# EAGLE board bodybase (EAGLE 9.2.2)

Size 135 x 235.4 mm. Coordinates in mm from the lower left corner, seen from the top.
Outline: 88.5,32.07 88.5,31.07 arc-90 87.5,30.07 47.5,30.07 arc-90 46.5,31.07 46.5,32.07 arc-90 47.5,33.07 87.5,33.07 arc-90 88.5,32.07
Outline: 61.15,190.3 61.15,213.3 73.85,213.3 73.85,190.3 61.15,190.3
Outline: 20.5,10.07 20.5,11.07 arc-90 21.5,12.07 45.5,12.07 arc-90 46.5,11.07 46.5,10.07 arc-90 45.5,9.07 21.5,9.07 arc-90 20.5,10.07
Outline: 104.5,177.88 104.5,177.55 arc46 105.08,176.19 105.95,175.35 107.71,174.03 131.79,156.07 132.61,155.46 arc-27 134.09,153.69 134.47,152.93 arc-27 135,150.69 135,77.83 arc-21 134.66,76.01 134.12,74.64 arc-21 133.14,73.07 132.29,72.14 119.83,58.62 118.97,57.7 arc21 117.99,56.13 117.46,54.76 arc21 117.12,52.94 117.12,5 arc-90 112.12,0 20.28,0 arc-90 17.28,3 17.28,51.68 17.28,52.96 arc21 16.95,54.74 16.41,56.17 arc21 15.47,57.71 14.62,58.67 2.66,72.1 1.81,73.05 arc-21 0.87,74.6 0.33,76.02 arc-21 0,77.8 0,150.69 arc-27 0.53,152.93 0.91,153.69 arc-27 2.39,155.46 3.21,156.07 27.3,174.03 29.06,175.35 30.21,176.47 arc46 30.5,177.15 30.5,177.55 30.5,177.88 30.5,186.34 arc75 26.81,191.16 26.14,191.35 6.36,196.73 6.19,196.77 arc-75 2.5,201.6 2.5,201.77 2.5,209.3 arc-86 6.49,213.58 26.67,215.01 arc86 30.5,219.12 30.5,230.4 arc-90 35.5,235.4 99.5,235.4 arc-90 104.5,230.4 104.5,219.12 arc86 108.33,215.01 128.51,213.58 arc-86 132.5,209.3 132.5,201.61 arc-75 128.82,196.79 128.64,196.74 108.86,191.35 108.18,191.16 arc75 104.5,186.34 104.5,177.88
Outline: 91,221.78 91,220.58 arc-90 90,219.38 45,219.38 arc-90 44,220.58 44,221.78 arc-90 45,222.78 90,222.78 arc-90 91,221.78
Outline: 89.5,18.05 113.41,18.05 arc-45 114.12,17.76 114.21,17.67 arc-45 114.5,16.96 114.5,16.14 arc-45 114.21,15.44 114.12,15.35 arc-45 113.41,15.05 89.5,15.05 arc-90 88.5,16.05 88.5,17.05 arc-90 89.5,18.05
Outline: 88.5,10.05 88.5,11.05 arc-90 89.5,12.05 113.41,12.05 arc-45 114.12,11.76 114.21,11.67 arc-45 114.5,10.96 114.5,10.14 arc-45 114.21,9.44 114.12,9.35 arc-45 113.41,9.05 89.5,9.05 arc-90 88.5,10.05
Outline: 21.5,18.03 45.5,18.03 arc-90 46.5,17.03 46.5,16.03 arc-90 45.5,15.03 21.5,15.03 arc-90 20.5,16.03 20.5,17.03 arc-90 21.5,18.03
Outline: 111.46,46.03 111.46,22.12 arc-45 111.17,21.42 110.79,21.03 109.46,21.03 arc-90 108.46,22.03 108.46,46.03 arc-90 109.46,47.03 110.46,47.03 arc-90 111.46,46.03
Outline: 26.54,45.94 26.54,22.12 arc-45 26.25,21.42 26.16,21.33 arc-45 25.45,21.03 24.63,21.03 arc-45 23.92,21.33 23.83,21.41 arc-45 23.54,22.12 23.54,46.03 arc-90 24.54,47.03 25.45,47.03 arc-45 26.16,46.74 26.25,46.65 arc-45 26.54,45.94
Outline: 64,82.09 64,71.09 arc-90 63,70.09 52,70.09 arc-90 51,71.09 51,82.09 arc-90 52,83.09 63,83.09 arc-90 64,82.09
Outline: 80.1,175.83 80.1,166.4 arc-90 79.1,165.4 55.9,165.4 arc-90 54.9,166.4 54.9,175.83 arc-90 55.9,176.83 79.1,176.83 arc-90 80.1,175.83
Outline: 91.04,227.82 91.04,226.62 arc-90 90.04,225.62 45.04,225.62 arc-90 44.04,226.62 44.04,227.82 arc-90 45.04,229.02 90.04,229.02 arc-90 91.04,227.82
Copper layers (1*16): Top 0.035mm / dielectric 1.5mm / Bottom 0.035mm
Design rules "SeeedStudio_2layer_DRU_no_angle_20140221": minimum track width 6mil, minimum drill 12mil, track to track 6mil, track to pad 6mil, pad to pad 6mil, via to via 6mil, smd to smd 0mil, copper to edge 10mil, drill to drill 10mil, minimum pad ring 10mil, minimum via ring 6mil, stop-mask expansion 2mil, vias tented up to drill 100mil, thermal gap 10mil
Holes 3.1 mm at 35.08,227.67 35.1,193.88 29.5,159.84 29.49,87.02 99.91,227.68 99.92,193.91 105.5,159.84 105.5,87.02 76.85,201.79 58.15,201.78 31.5,26.77 31.5,56.77 103.5,26.77 103.5,54.77
Holes 6.3 mm at 15.52,203.38 119.48,203.4
Holes 2.7 mm at 29.91,145.63 34.63,141.49 49.54,143.88 29.91,96.35 34.64,100.19 48.28,95.58 100.43,141.48 100.33,128.26 87.87,145.64 100.44,100.2 88,96.34

## Placement (x,y rotation side)
E$1  [LOGO_FABO_L]  14.12,116.29 0 top

## Library data of the parts
E$1 = FaBo-Logo

## Text on the board
tPlace: Arduino | RaspberryPi | IchigoJam | Rev 1.0.0